# Altium PCB CNCMicaMini.PcbDoc
Units mil, origin at the board's own origin, x right, y up, seen from the top; angles counter-clockwise.
Board outline 3185 x 2710 mil, 2 copper layers (Top Layer, Bottom Layer); 20 components, 34 nets, 122 pads, 14 vias.
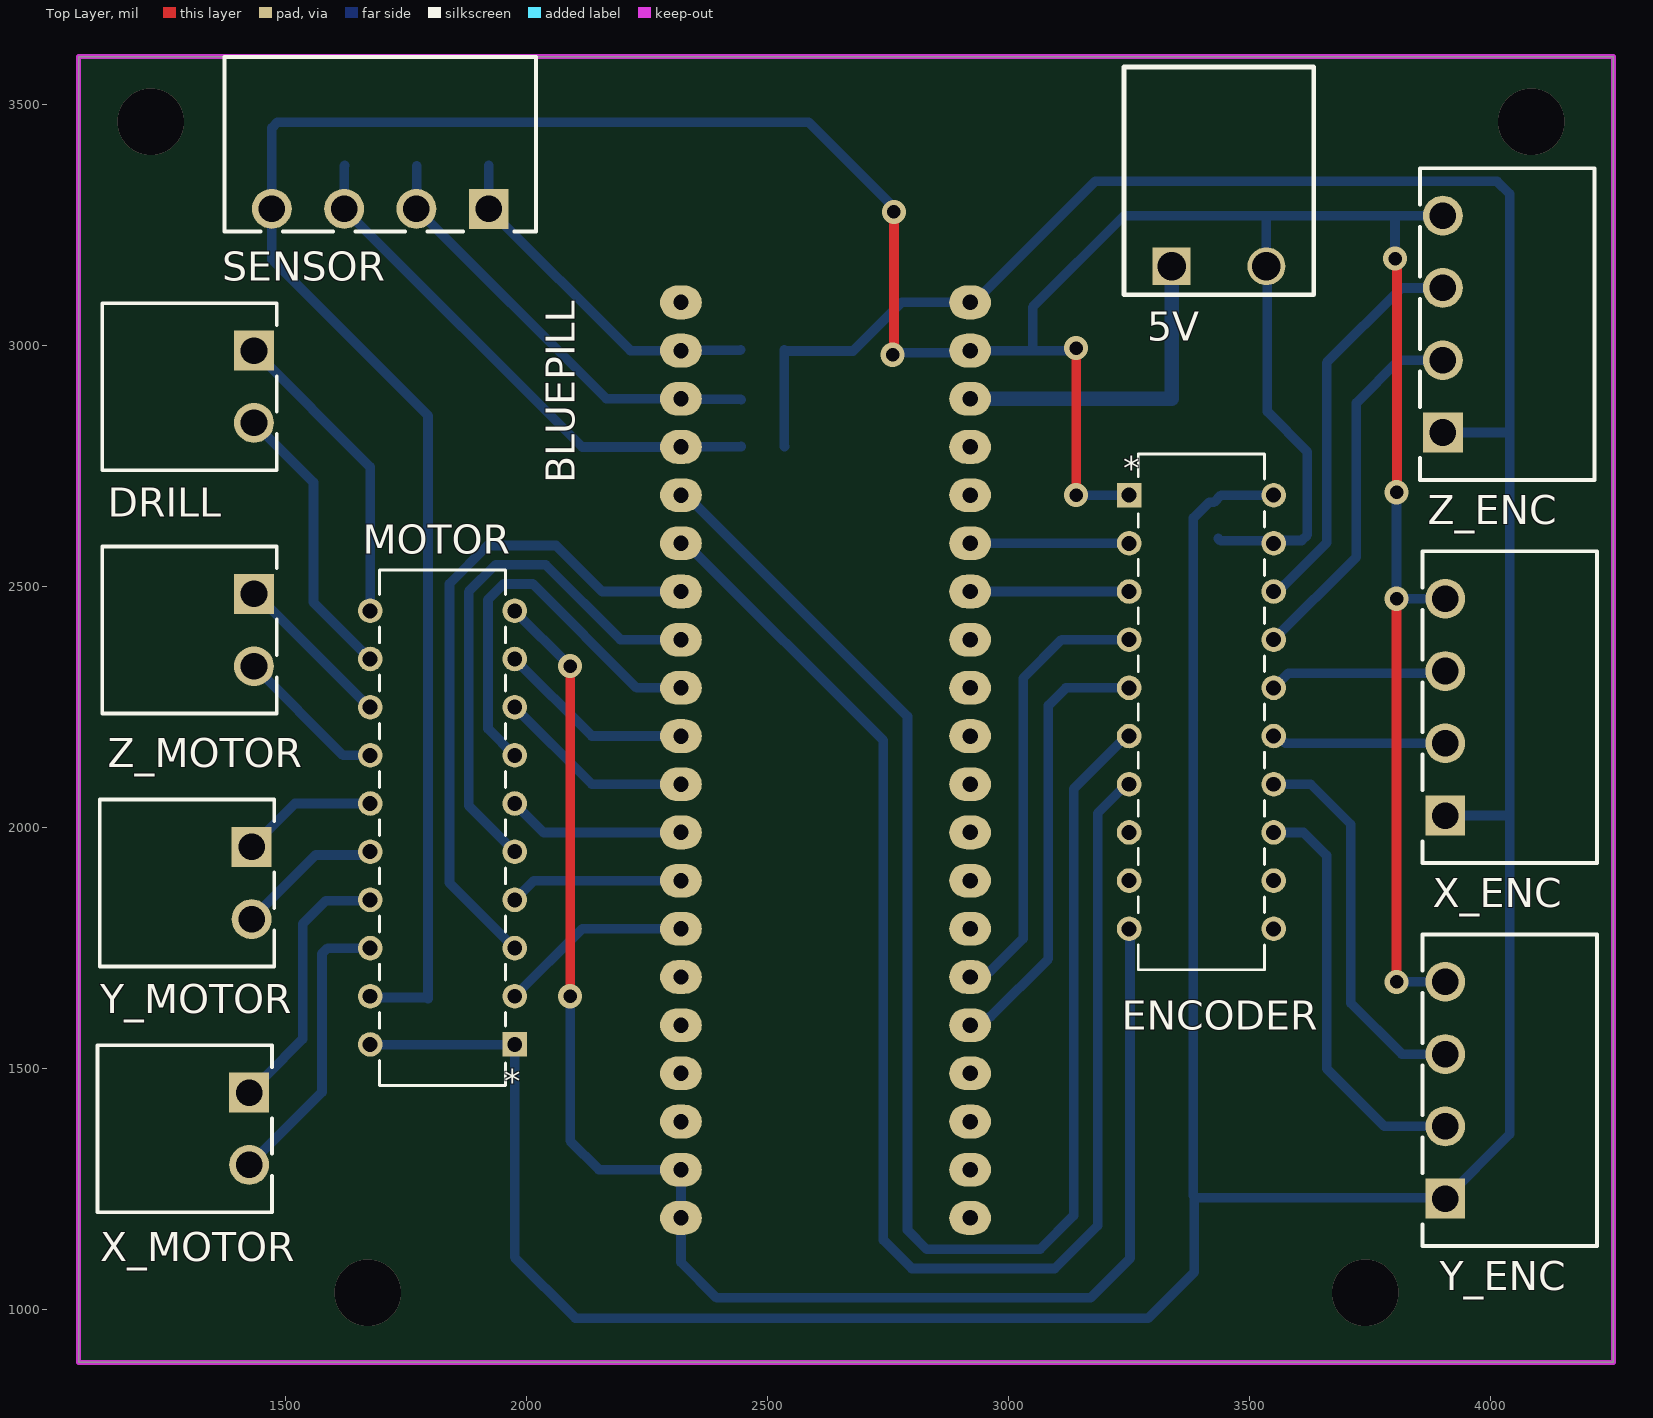
[diagram p0: Top Layer view]
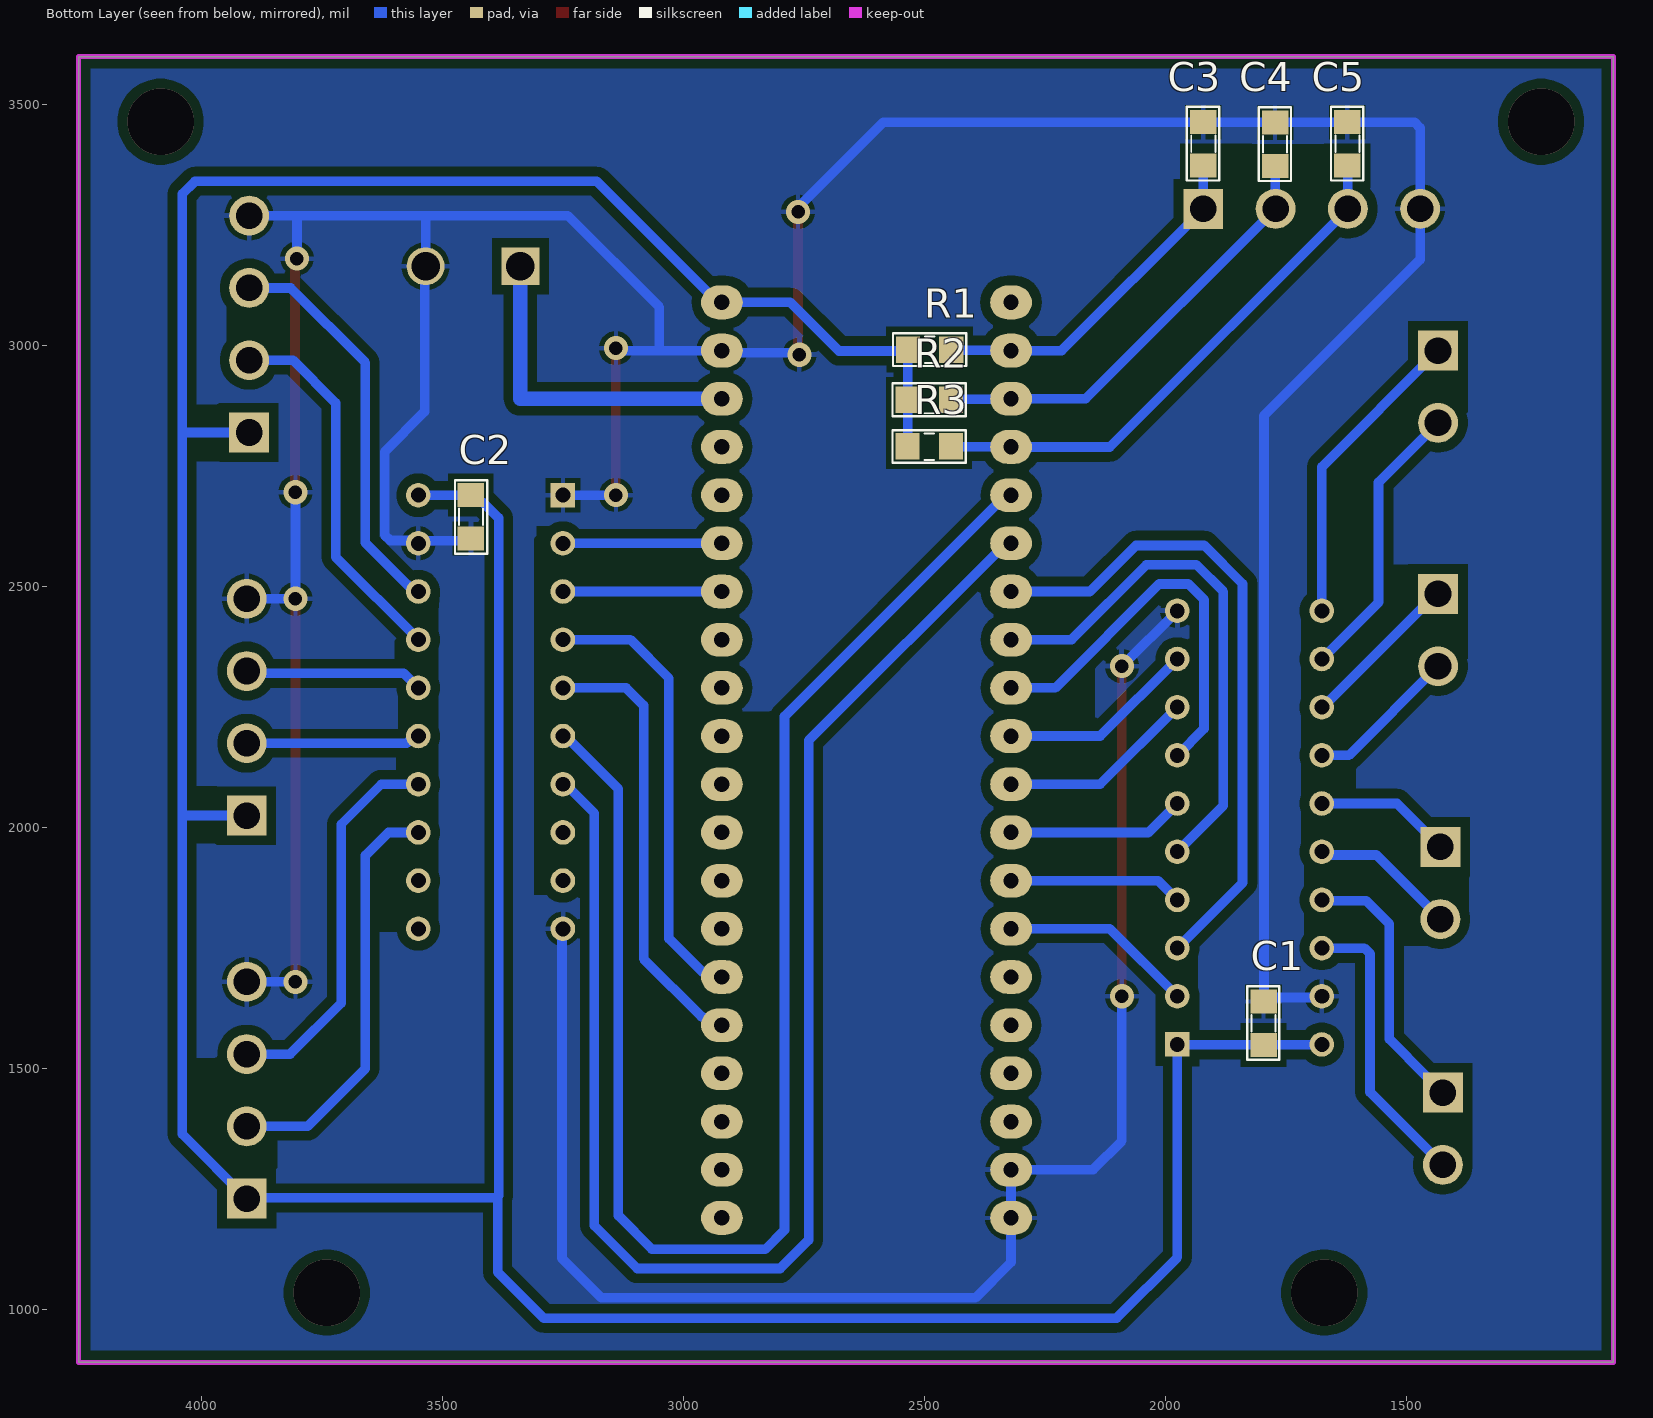
[diagram p1: Bottom Layer view, seen from below]
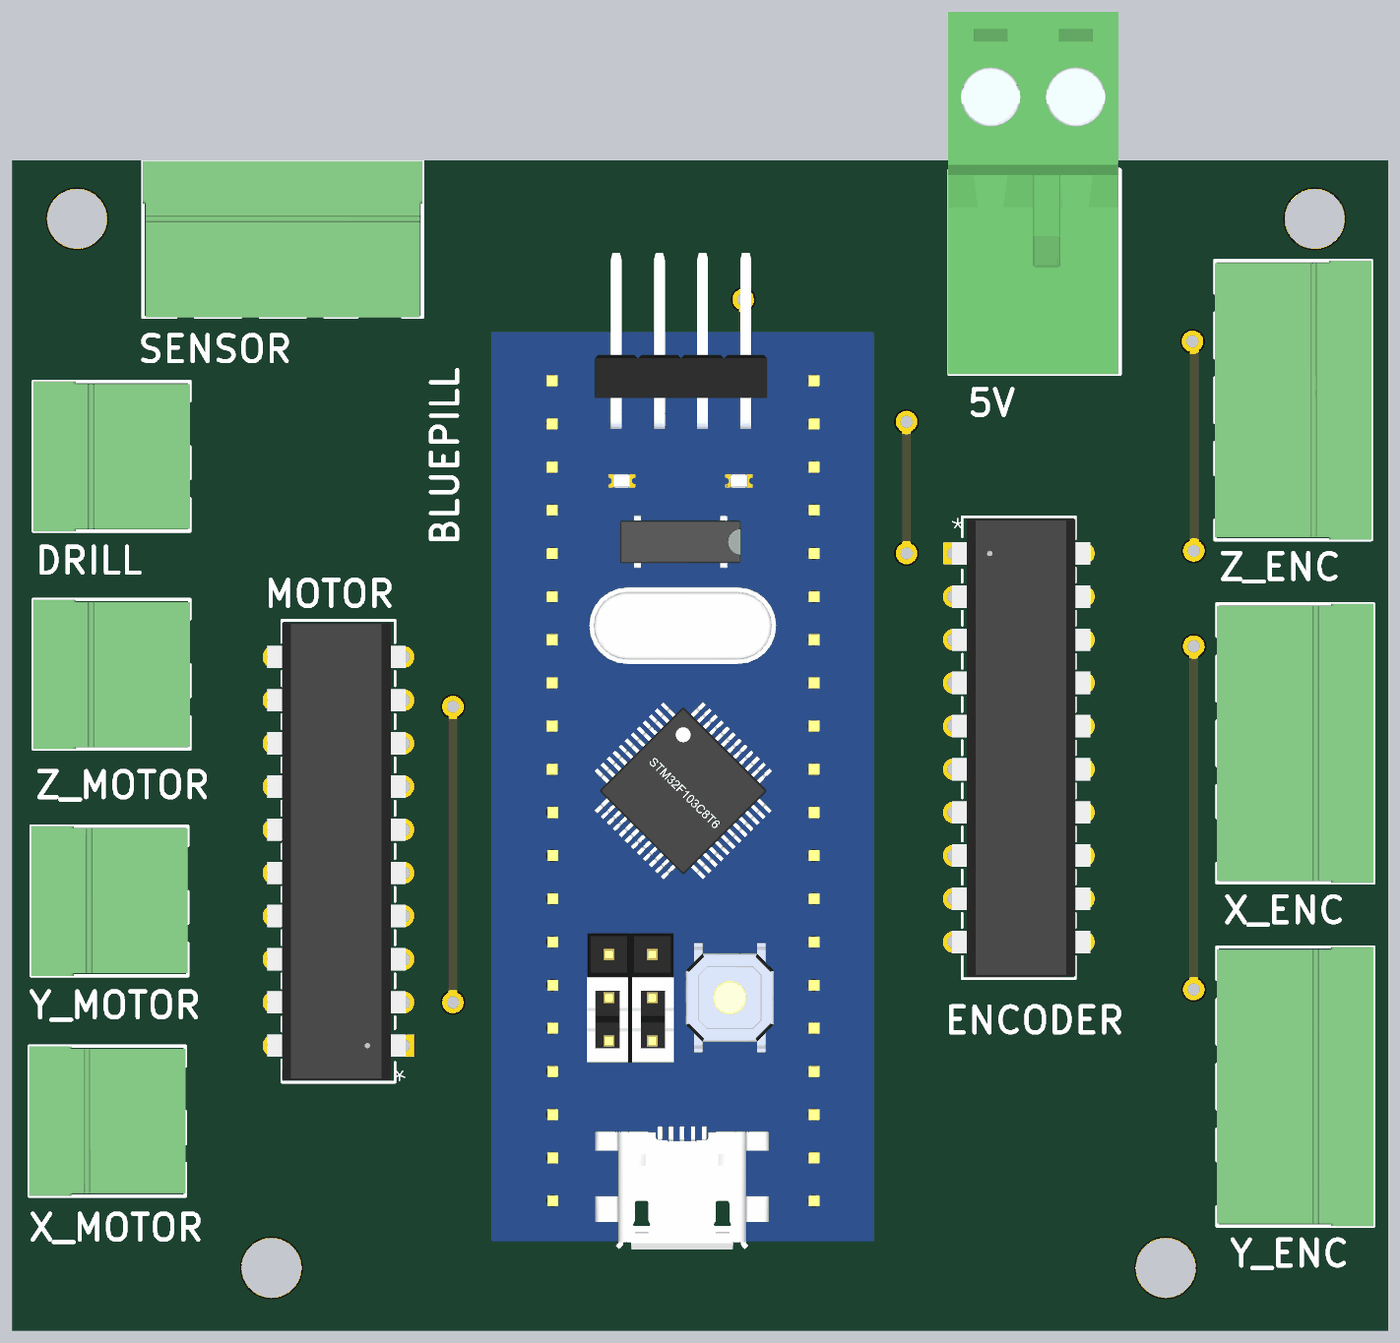
[diagram p2: 3D render of the assembled board from above, using the file's embedded part models]
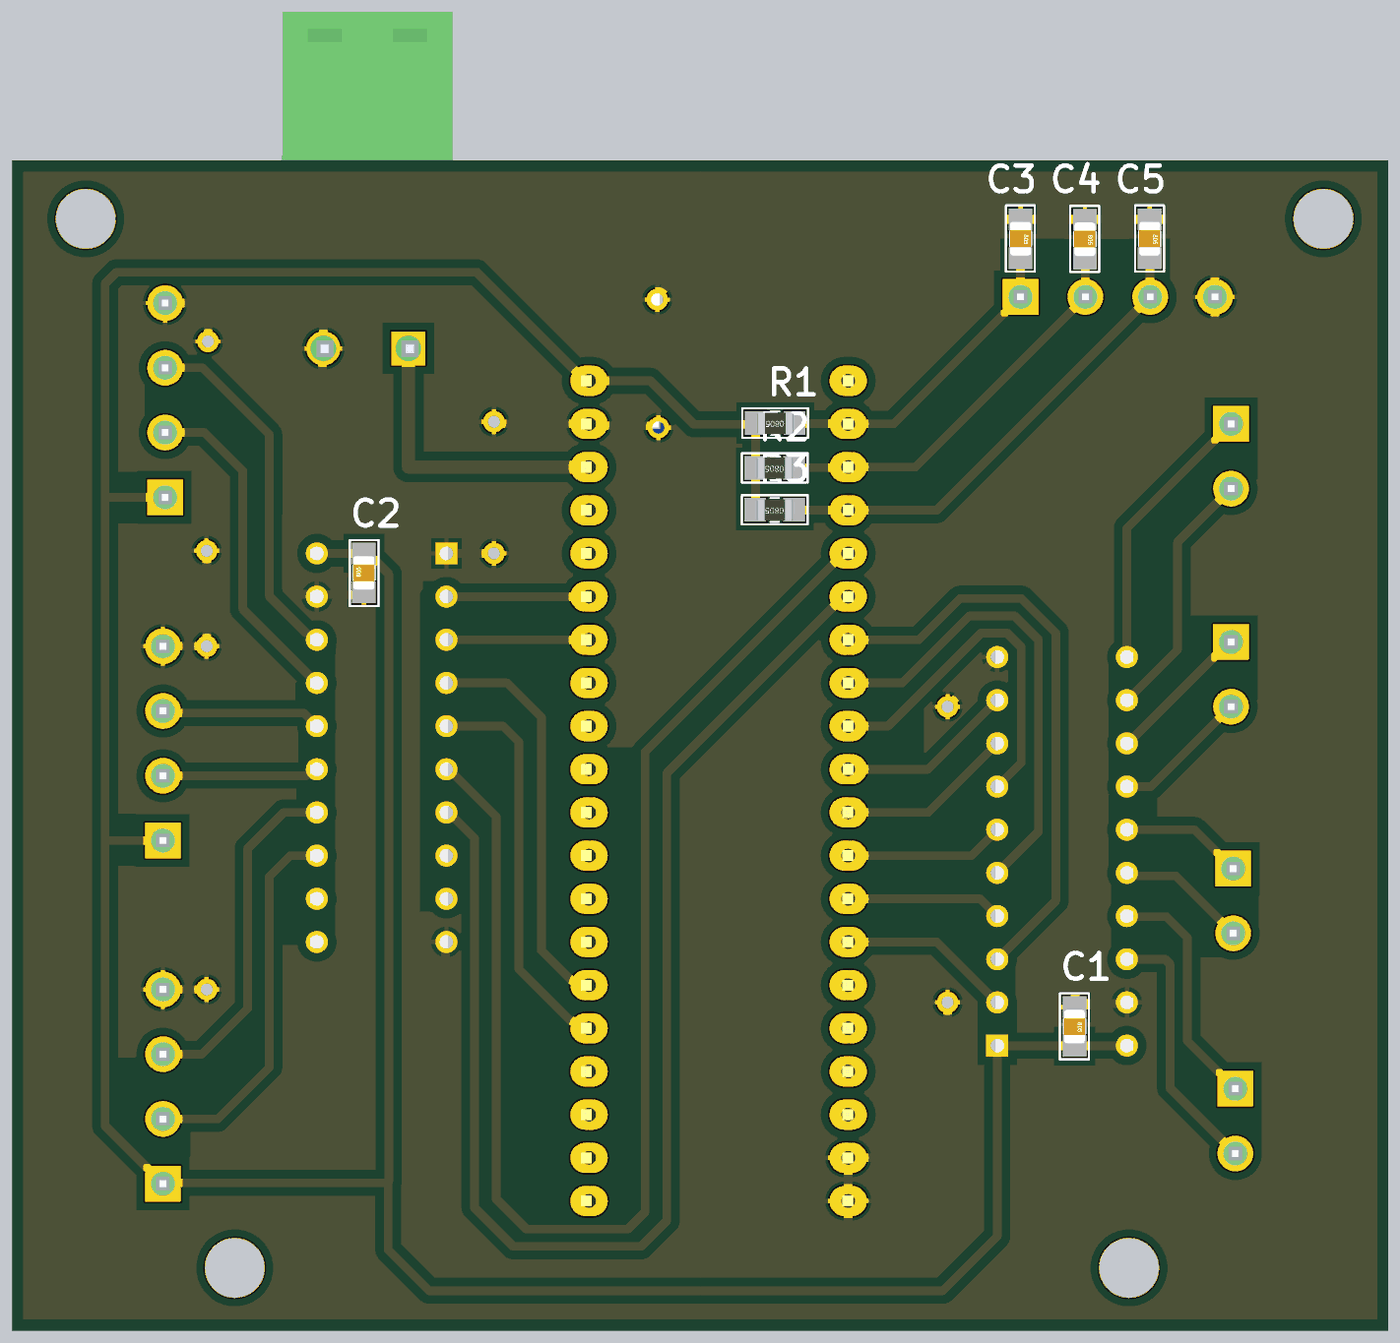
[diagram p3: 3D render of the assembled board from below, using the file's embedded part models]

## Layer stack, top to bottom
Top Solder: solder mask 0.4, Solder Resist, Dk 3.5
Top Layer: signal copper 1.4
Dielectric 1: dielectric 12.6, FR-4, Dk 4.8
Bottom Layer: signal copper 1.4
Bottom Solder: solder mask 0.4, Solder Resist, Dk 3.5

## Board outline
1070,890 1070,3600 4255,3600 4255,890

## Design rules (kind name [scope] priority, off if disabled: settings)
Clearance [All] p1: gap=20 ignorepadtopadclearanceinfootprint=FALSE
PolygonConnect [All] p1: connectstyle=Relief reliefconductorwidth=10 reliefentries=4 polygonreliefangle="90 Angle" airgapwidth=10
RoutingVias [All] p1: holewidth=28 width=50 viastyle="Through Hole" minholewidth=28 minwidth=50 maxholewidth=28 maxwidth=50
SolderMaskExpansion [All] p1: expansion=4 istentingtop=FALSE
Width [All] p1: maxlimit=50 minlimit=10 preferedwidth=30 minimp=50.000000 maximp=50.000000 favimp=50.000000
30 further rules are at their usual default settings.

## Components (designator, comment, footprint, x,y, rotation, side; value= is the part's Value field where it differs from the comment)
5V "terminal 2p 5mm" "terminal 2p 5mm" 3338.15,3165 r0 top
BLUEPILL "BluePill" BlUEPILL 2320,1190 r0 top
C1 "Cap-100nF-50V-0805" CAP-SM-0805 1796,1639 r270 bottom value=100nF/50V
C2 "Cap-100nF-50V-0805" CAP-SM-0805 3441,2600 r90 bottom value=100nF/50V
C3 "Cap-100nF-50V-0805" CAP-SM-0805 1921,3464 r270 bottom value=100nF/50V
C4 "Cap-100nF-50V-0805" CAP-SM-0805 1772,3463 r270 bottom value=100nF/50V
C5 "Cap-100nF-50V-0805" CAP-SM-0805 1622,3464 r270 bottom value=100nF/50V
DRILL "691322310002" 691322310002 1300,2915 r270 top
ENCODER "74HC245N" 74HC245N 3250,2690 r0 top
MOTOR "74HC245N" 74HC245N 1975,1550 r180 top
R1 "Res-10k-0805" RES-SM-0805 2444,2992 r0 bottom value=10K
R2 "Res-10k-0805" RES-SM-0805 2445,2888 r0 bottom value=10K
R3 "Res-10k-0805" RES-SM-0805 2445,2791 r0 bottom value=10K
SENSOR "691322310004" 691322310004 1696,3418 r180 top (schematic designator P1)
X_ENC "691322310004" 691322310004 4040,2250 r90 top
X_MOTOR "691322310002" 691322310002 1290,1375 r270 top
Y_ENC "691322310004" 691322310004 4040,1455 r90 top
Y_MOTOR "691322310002" 691322310002 1295,1885 r270 top
Z_ENC "691322310004" 691322310004 4035,3045 r90 top
Z_MOTOR "691322310002" 691322310002 1300,2410 r270 top

## Footprints (in the part's own frame and the unit in brackets; to place one, negate y for a bottom-side part, rotate by r counter-clockwise, add the part's x,y. Pads: shape width x height; smd on the part's side, far side on the other; paste and mask are expansions set on the pad)
74HC245N [mil]
  rect 51x51 hole 31 mask+0: 1(0,0)
  round 51 hole 31 mask+0: 2(0,-100) 3(0,-200) 4(0,-300) 5(0,-400) 6(0,-500) 7(0,-600) 8(0,-700) 9(0,-800) 10(0,-900) 11(300,-900) 12(300,-800) 13(300,-700) 14(300,-600) 15(300,-500) 16(300,-400) 17(300,-300) 18(300,-200) 19(300,-100) 20(300,0)
  silkscreen extent 19,-985 281,85, body extent -5,-980 315,80, height 170
691322310002 [mm] "Horizontal PCB Header, pitch 3.81mm, 02p"
  rect 2.1x2.1 hole 1.4: 1(-1.905,3.4)
  round 2.1 hole 1.4: 2(1.905,3.4)
  silkscreen extent -4.4,-4.6 4.41,4.6, body extent -4.4,-4.6 4.41,4.6, height 7.25
691322310004 [mm] "Horizontal PCB Header, pitch 3.81mm, 04p"
  rect 2.1x2.1 hole 1.4: 1(-5.715,3.4)
  round 2.1 hole 1.4: 2(-1.905,3.4) 3(1.905,3.4) 4(5.715,3.4)
  silkscreen extent -8.21,-4.6 8.22,4.6, body extent -8.21,-4.6 8.21,4.6, height 7.25
BlUEPILL [mil]
  oval 86.61x70 hole 32: 1(0,1900) 2(0,1800) 3(0,1700) 4(0,1600) 5(0,1500) 6(0,1400) 7(0,1300) 8(0,1200) 9(0,1100) 10(0,1000) 11(0,900) 12(0,800) 13(0,700) 14(0,600) 15(0,500) 16(0,400) 17(0,300) 18(0,200) 19(0,100) 20(0,0) 21(600,0) 22(600,100) 23(600,200) 24(600,300) 25(600,400) 26(600,500) 27(600,600) 28(600,700) 29(600,800) 30(600,900) 31(600,1000) 32(600,1100) 33(600,1200) 34(600,1300) 35(600,1400) 36(600,1500) 37(600,1600) 38(600,1700) 39(600,1800) 40(600,1900)
  body extent -141,-113 745,2196, height 571
CAP-SM-0805 [mil]
  rect 50x55 smd: 1(0,0) 2(90,0)
  silkscreen extent -32,-34 121,33, body extent 6,-25 84,25, height 31
RES-SM-0805 [mil]
  rect 50x55 smd: 1(0,0) 2(90,0)
  silkscreen extent -31,-34 121,34, body extent -5,-24 95,25, height 20
"terminal 2p 5mm" [mm]
  rect 2x2 hole 1.5: 1(0,0)
  round 2 hole 1.5: 2(5,0)
  silkscreen extent -2.5,-1.5 7.5,10.5, body extent -2.59,-1.52 7.41,19.79, height 15.1

## Part data
C1 C2 C3 C4 C5: "CAP CER 0.1UF 50V Y5V 0805", Manufacturer="Samsung Electro-Mechanics", Manufacturer Part Number=CL21F104ZBCNNNC, Supplier 1 Part Number=1276-1007-1-ND, Local Supplier=thegioiic, Local Supplier Link=https://www.thegioiic.com/products/tu-gom-0805-100nf-0-1uf-50v, Supplier 1=Digikey, Supplier 1 Link=https://www.digikey.com/product-detail/en/samsung-electro-mechanics/CL21F104ZBCNNNC/1276-1007-1-ND/3889093
DRILL X_MOTOR Y_MOTOR Z_MOTOR: "WR-TBL Serie 322 Horizontal PCB Header, Pluggable, pitch 3.81mm, 2p", Operating Temperature="-40 to +105degC", Rated Current [UL]=10A, Working Voltage [UL]=300VAC, Application=Pluggable, Compliance=RoHS, ComponentLink1Description=Manufacturer, ComponentLink1URL=http://www.we-online.de, ComponentLink2Description=Datasheet, ComponentLink2URL=https://katalog.we-online.de/em/datasheet/691322310002.pdf, Modularity=No, Mounting Technology=THT, Packaging=Box, Part Number=691322310002, PCB/Cable/Panel=PCB, Pin Number=2, Pitch=3.81mm, Published Date="October 2019", Publisher="Wurth Elektronik", Type=Horizontal
ENCODER MOTOR: "No Description Available", Mfr_Name=NXP, Copyright="Copyright (C) 2022 Ultra Librarian. All rights reserved.", Manufacturer_Part_Number=74HC245N, RefDes=RefDes, Type=DEV
R1 R2 R3: "RES 10K OHM 1% 1/4W 0805", Manufacturer="Stackpole Electronics Inc", Manufacturer Part Number=RNCP0805FTD10K0, Supplier 1 Part Number=RNCP0805FTD10K0CT-ND, Local Supplier=thegioiic, Local Supplier Link=https://www.thegioiic.com/products/dien-tro-10-kohm-0805-5, Supplier 1=Digikey, Supplier 1 Link=https://www.digikey.com/product-detail/en/stackpole-electronics-inc/RNCP0805FTD10K0/RNCP0805FTD10K0CT-ND/2240601
SENSOR X_ENC Y_ENC Z_ENC: "WR-TBL Serie 322 Horizontal PCB Header, Pluggable, pitch 3.81mm, 4p", Operating Temperature="-40 to +105degC", Rated Current [UL]=10A, Working Voltage [UL]=300VAC, Application=Pluggable, Compliance=RoHS, ComponentLink1Description=Manufacturer, ComponentLink1URL=http://www.we-online.de, ComponentLink2Description=Datasheet, ComponentLink2URL=https://katalog.we-online.de/em/datasheet/691322310004.pdf, Modularity=No, Mounting Technology=THT, Packaging=Box, Part Number=691322310004, PCB/Cable/Panel=PCB, Pin Number=4, Pitch=3.81mm, Published Date="October 2019", Publisher="Wurth Elektronik", Type=Horizontal

## Via types
v1: diameter 50, hole 28, Top Layer to Bottom Layer, 10 vias
v2: diameter 137.8, hole 137.8, Top Layer to Bottom Layer, 4 vias

## Nets (pads, with @x,y where several pads share a name; then routed paths per layer and width w, separated by ;. In a path a pad name is that pad's centre, name@x,y a point inside that pad or via, vN(x,y) a via of type N, cw(c..) or ccw(c..) an arc to the next point about the centre after c; other vN are vias at no path point)
3V3: BLUEPILL.40 C1.2 C2.2 ENCODER.20 MOTOR.1 MOTOR.20 R1.2 R2.2 R3.2 X_ENC.1 Y_ENC.1 Z_ENC.1 | length 8802.7
  Bottom Layer w20: MOTOR.20 1675.5,1549.5 1795.5,1549.5 C1.2 1796.5,1549.5 1974.5,1549.5 MOTOR.1 1975,1108 2101,982 3290,982 3385,1077 3385,1234.22 ; R3.2 2534.5,2791.5 2534.5,2991.5 R1.2 2537,2989 2677,2989 2778,3090 BLUEPILL.40 2928.31,3090 3179.65,3341.34 4013.66,3341.34 4040,3315 4040,2820 ; 3389.36,1229.86 3383.5,1235.72 3383.5,2642.5 3416,2675 3426,2675 C2.2 ENCODER.20 ; 3391.36,1231.86 3904.29,1231.86 Y_ENC.1 ; Z_ENC.1 4040,2820 ; Y_ENC.1@3902.14,1226 4040,1363.86 4040,2025 ; X_ENC.1 4040,2025 ; 4040,2025 4040,2820
5V: 5V.1 BLUEPILL.38 | length 693.1
  Bottom Layer w30: BLUEPILL.38 3338.15,2890 5V.1
DRILL_DIR: DRILL.1 MOTOR.11 | length 639.9
  Bottom Layer w20: DRILL.1 1675,2748.86 MOTOR.11
DRILL_PWM: DRILL.2 MOTOR.12 | length 589.9
  Bottom Layer w20: DRILL.2 1557.46,2716.4 1557.46,2467.54 MOTOR.12
GND: 5V.2 BLUEPILL.19 BLUEPILL.20 BLUEPILL.39 C1.1 C2.1 C3.1 C4.1 C5.1 ENCODER.1 ENCODER.10 ENCODER.19 MOTOR.10 MOTOR.19 SENSOR.4 X_ENC.4 Y_ENC.4 Z_ENC.4 | length 11511.8
  Top Layer w20: v1(2090,1650) v1(2090,2335) ; v1(2759.38,2981.34) 2762,2983.96 v1(2762,3278) ; v1(3140,2690) v1(3140,2995) ; v1(3802,3181) 3806,3177 3806,2697 v1(3805,2696) ; v1(3805,1680) v1(3805,2475)
  Bottom Layer w20: MOTOR.19 1677.5,1647.5 1792.5,1647.5 1795,1645 1795,2855 1471,3179 SENSOR.4 1471,3452.28 1482.71,3464 C5.1 C3.1 2585,3464 2762,3287 v1(2762,3278) ; MOTOR.10 v1(2090,2335) ; v1(2090,1650) 2090,1350 2150,1290 BLUEPILL.19 BLUEPILL.20 2320,1098 2394,1024 3170,1024 3252,1106 3252,1788 ENCODER.10 ; v1(2759.38,2981.34) 2763.71,2985.67 2915.67,2985.67 BLUEPILL.39 3050,2990 ; v1(3140,2690) ENCODER.1 ; v1(3140,2995) 3135,2990 3050,2990 ; C2.1@3435,2600 3440,2595 3545,2595 ENCODER.19 3555.93,2595.93 3608.28,2595.93 3620,2607.65 3620,2780 3536.85,2863.15 3536.85,3163.15 5V.2 3535,3258.29 ; 3544.47,3270 3240,3270 3050,3080 3050,2990 ; 3546.72,3270 3804,3270 ; v1(3802,3181) 3802,3268 3804,3270 ; v1(3805,1680) Y_ENC.4 ; v1(3805,2696) v1(3805,2475) X_ENC.4 ; Z_ENC.4 3804,3270
MCU_DRILL_DIR: BLUEPILL.10 MOTOR.9 | length 411.3
  Bottom Layer w20: MOTOR.9 2135,2190 BLUEPILL.10
MCU_DRILL_PWM: BLUEPILL.11 MOTOR.8 | length 411.3
  Bottom Layer w20: MOTOR.8 2135,2090 BLUEPILL.11
MCU_X_A_ENC: BLUEPILL.25 ENCODER.5 | length 928.2
  Bottom Layer w20: BLUEPILL.25 2941.84,1590 2959.45,1607.62 2962.62,1607.62 3082.56,1727.56 3082.56,2253.77 3118.79,2290 ENCODER.5
MCU_X_B_ENC: BLUEPILL.26 ENCODER.4 | length 936.3
  Bottom Layer w20: BLUEPILL.26 2929.57,1699.57 2959.57,1699.57 3030,1770 3030,2310 3110,2390 ENCODER.4
MCU_X_DIR: BLUEPILL.7 MOTOR.3 | length 1365.2
  Bottom Layer w20: MOTOR.3 1839.5,1885.5 1839.5,2506.13 1918.87,2585.5 2060.77,2585.5 2156.27,2490 BLUEPILL.7
MCU_X_HOME: BLUEPILL.2 C3.2 R1.1 SENSOR.1 | length 735.5
  Bottom Layer w20: C3.2 SENSOR.1 2215.14,2990 BLUEPILL.2 2321,2991 2443,2991 R1.1
MCU_X_PWM: BLUEPILL.14 MOTOR.2 | length 403
  Bottom Layer w20: MOTOR.2 2115,1790 BLUEPILL.14
MCU_Y_A_ENC: BLUEPILL.5 ENCODER.6 | length 3162.2
  Bottom Layer w20: BLUEPILL.5 2330.84,2690 2790,2230.84 2790,1165 2830,1125 3065,1125 3135,1195 3135,2080 3245,2190 ENCODER.6
MCU_Y_B_ENC: BLUEPILL.6 ENCODER.7 | length 3078.1
  Bottom Layer w20: BLUEPILL.6 2330.84,2590 2740,2180.84 2740,1144.29 2799.29,1085 3095.71,1085 3185,1174.29 3185,1827.5 3185,2030 3245,2090 ENCODER.7
MCU_Y_DIR: BLUEPILL.8 MOTOR.5 | length 1107.2
  Bottom Layer w20: MOTOR.5 1879.5,2045.5 1879.5,2489.56 1935.44,2545.5 2039.05,2545.5 2194.55,2390 BLUEPILL.8
MCU_Y_HOME: BLUEPILL.3 C4.2 R2.1 SENSOR.2 | length 927.4
  Bottom Layer w20: C4.2 1771.5,3372.5 1771.5,3284.64 SENSOR.2 2165.14,2890 BLUEPILL.3 2321,2889 2444,2889 R2.1
MCU_Y_PWM: BLUEPILL.13 MOTOR.4 | length 361.6
  Bottom Layer w20: MOTOR.4 2015,1890 BLUEPILL.13
MCU_Z_A_ENC: BLUEPILL.34 ENCODER.3 | length 330
  Bottom Layer w20: BLUEPILL.34 ENCODER.3
MCU_Z_B_ENC: BLUEPILL.35 ENCODER.2 | length 330
  Bottom Layer w20: BLUEPILL.35 ENCODER.2
MCU_Z_DIR: BLUEPILL.9 MOTOR.7 | length 849.2
  Bottom Layer w20: MOTOR.7 1919.5,2205.5 1919.5,2472.99 1952.01,2505.5 2012.55,2505.5 2228.05,2290 BLUEPILL.9
MCU_Z_HOME: BLUEPILL.4 C5.2 R3.1 SENSOR.3 | length 1119.4
  Bottom Layer w20: C5.2 1621.5,3373.5 1621.5,3284.64 SENSOR.3 2115.14,2790 BLUEPILL.4 2320.5,2790.5 2444.5,2790.5 R3.1
MCU_Z_PWM: BLUEPILL.12 MOTOR.6 | length 369.9
  Bottom Layer w20: MOTOR.6 2035,1990 BLUEPILL.12
X_A_ENC: ENCODER.15 X_ENC.2 | length 362.4
  Bottom Layer w20: ENCODER.15 3559.74,2190 3574.74,2175 X_ENC.2
X_B_ENC: ENCODER.16 X_ENC.3 | length 370.6
  Bottom Layer w20: ENCODER.16 3580,2320 3901.14,2320 X_ENC.3
X_DIR: MOTOR.17 X_MOTOR.1 | length 556.7
  Bottom Layer w20: X_MOTOR.1 1457.7,1483.84 1535,1561.14 1535,1800 1583.36,1848.36 1673.36,1848.36 MOTOR.17
X_PWM: MOTOR.18 X_MOTOR.2 | length 605.7
  Bottom Layer w20: X_MOTOR.2 1575,1451.14 1575,1738.28 1586.72,1750 MOTOR.18
Y_A_ENC: ENCODER.14 Y_ENC.3 | length 805.4
  Bottom Layer w20: ENCODER.14 3627,2090 3710,2007 3710,1636 3816,1530 Y_ENC.3
Y_B_ENC: ENCODER.13 Y_ENC.2 | length 867.7
  Bottom Layer w20: ENCODER.13 3612,1990 3660,1942 3660,1500 3780,1380 Y_ENC.2
Y_DIR: MOTOR.15 Y_MOTOR.1 | length 283.4
  Bottom Layer w20: Y_MOTOR.1 1518.86,2050 MOTOR.15
Y_PWM: MOTOR.16 Y_MOTOR.2 | length 304.1
  Bottom Layer w20: Y_MOTOR.2 1561.97,1943.11 1668.11,1943.11 MOTOR.16
Z_A_ENC: ENCODER.17 Z_ENC.2 | length 778.8
  Bottom Layer w20: ENCODER.17 3721.53,2561.53 3721.53,2881.53 3810,2970 Z_ENC.2
Z_B_ENC: ENCODER.18 Z_ENC.3 | length 831.1
  Bottom Layer w20: ENCODER.18 3558.39,2490 3573.17,2504.78 3573.7,2504.78 3660,2591.08 3660,2965 3815,3120 Z_ENC.3
Z_DIR: MOTOR.13 Z_MOTOR.1 | length 338.5
  Bottom Layer w20: Z_MOTOR.1 1460.2,2458.66 1464.2,2458.66 1672.86,2250 MOTOR.13
Z_PWM: MOTOR.14 Z_MOTOR.2 | length 317.8
  Bottom Layer w20: Z_MOTOR.2 1618.86,2150 MOTOR.14
pads on no net: BLUEPILL.1 BLUEPILL.15 BLUEPILL.16 BLUEPILL.17 BLUEPILL.18 BLUEPILL.21 BLUEPILL.22 BLUEPILL.23 BLUEPILL.24 BLUEPILL.27 BLUEPILL.28 BLUEPILL.29 BLUEPILL.30 BLUEPILL.31 BLUEPILL.32 BLUEPILL.33 BLUEPILL.36 BLUEPILL.37 ENCODER.8 ENCODER.9 ENCODER.11 ENCODER.12
copper on no net:
  other v2: 1670,1035 3740,1035 1220,3465 4085,3465

## Polygon pours and split planes (outlines as drawn)
GND on Bottom Layer "bot" (solid, remove dead copper, pour order 1): 1070,3600 4255,3600 4255,890 1070,890

## Keep-outs
Keep-Out Layer:
  the board outline again, w10

## Other copper
Bottom Layer:
  pour cut-out: 1372.52,2926.64 1372.52,2862.07 1404.8,2894.36
  pour cut-out: 3300,2609.23 3311,2598.23 3311,1888.96 3267.56,1932.4
  pour cut-out: 1819.5,3418 1820.5,3419 1873.5,3419 1873.5,3381.5 1876,3379
  pour cut-out: 1669.5,3419 1670.5,3418 1724.5,3418 1724.5,3377.5 1727,3375
  pour cut-out: 3967.48,1963.66 3969.82,1966 4013,1966 4013,1979 4020,1986
  pour cut-out: 3967.48,2086.34 3968.14,2087 4023,2087 4023,2077
  pour cut-out: 3962.48,2758.66 3962.82,2759 4017,2759 4017,2778 4019,2780
  pour cut-out: 3962.48,2881.34 3964.82,2879 4013,2879 4013,2865 4017,2861
  pour cut-out: 3948.79,3009.1 3948.79,3080.9 3917.34,3080.9 3895.1,3058.66
  pour cut-out: 3595.5,2392.71 3600,2388.21 3600,2341 3578,2341 3571,2348
  pour cut-out: 3595.5,2087.29 3597,2088.79 3597,2148 3565.71,2148 3564.49,2146.78
  pour cut-out: 3595.5,2284.01 3592.4,2280.91 3592.4,2207.56 3583.93,2207.56 3555.99,2235.5
  pour cut-out: 3504.5,2484.01 3507.6,2480.91 3507.6,1907.56 3526.7,1907.56 3554.64,1935.5
  pour cut-out: 3595.5,1784.01 3596.51,1783 3630,1783 3630,1791 3643,1804
  pour cut-out: 3507.6,1872.44 3507.6,1807.56 3519.05,1807.56 3555.99,1844.5
  pour cut-out: 3967.48,1523.96 3969.44,1522 4016,1522 4016,1490 4019,1487
  pour cut-out: 3844.8,1291.34 3842,1294.14 3842,1354 3860,1354 3879,1335
  pour cut-out: 2819.23,2238.67 2821.83,2241.27 2883.12,2241.27 2883.12,2229.37 2858.11,2204.36
  pour cut-out: 3286.41,1862.06 3288.47,1860 3311,1860 3311,1886
  pour cut-out: 3277.94,2626.41 3278.35,2626 3305,2626 3305,2606 3308,2603
  pour cut-out: 2020.5,1595.5 2020.5,1650.5 1984,1614
  pour cut-out: 1929.5,1587.8 1929.5,1643.5 1977,1596
  pour cut-out: 1932.6,1732.44 1932.6,1667.56 1942.56,1667.56 1959,1684
  pour cut-out: 1644.74,2484.09 1640.83,2488 1583,2488 1583,2479 1592,2470
  pour cut-out: 1603.73,2123.8 1605,2122.52 1605,2081 1640.17,2081 1640.91,2080.26
  pour cut-out: 1717.4,2132.44 1717.4,2067.56 1703,2096
  pour cut-out: 1717.4,2432.44 1717.4,2367.56 1692.56,2392.4
  pour cut-out: 1495.2,2546.34 1495.53,2546 1529,2546 1529,2516 1531,2514
  pour cut-out: 1717.4,2332.44 1717.4,2267.56 1692.56,2292.4
  pour cut-out: 1717.4,2232.44 1717.4,2168.09 1680.99,2204.5
  pour cut-out: 1372.52,2433 1372.52,2350.53 1415.97,2393.98
  pour cut-out: 1363,1398 1363,1376 1367,1376
  pour cut-out: 1362.52,1388.66 1362.52,1306.04 1373.96,1306.04 1380,1300
  pour cut-out: 1367.52,1898.66 1369.88,1896.3 1369.88,1827.89 1377.89,1827.89 1405,1855
  pour cut-out: 1446.75,1751.02 1450.73,1755 1505,1755 1505,1785
  pour cut-out: 1711.41,1922.06 1711.41,1877.94 1707.02,1877.94 1692.56,1892.4
  pour cut-out: 1711.41,1822.06 1711.41,1777.94 1707.02,1777.94 1692.56,1792.4
  pour cut-out: 1717.4,2032.44 1717.4,1967.56 1692.56,1992.4
  pour cut-out: 2147.53,2220.26 2145,2222.79 2145,2330 2235,2240

## Text inside footprints (layer, text, board x,y; h text height)
ENCODER: Top Overlay "*" at 3237.5,2720.5 h50; Mechanical 13 "*" at 3271.5,2665 h50
MOTOR: Top Overlay "*" at 1987.5,1519.5 h50 r180; Mechanical 13 "*" at 1953.5,1575 h50 r180